# Altium PCB Copy of PCB1.PcbDoc
Units mil, origin at the board's own origin, x right, y up, seen from the top; angles counter-clockwise.
Board outline 1000 x 2250.08 mil, 2 copper layers (Top Layer, Bottom Layer); 42 components, 56 nets, 164 pads, 0 vias.
Unrouted connection lines stored in the file: 74.
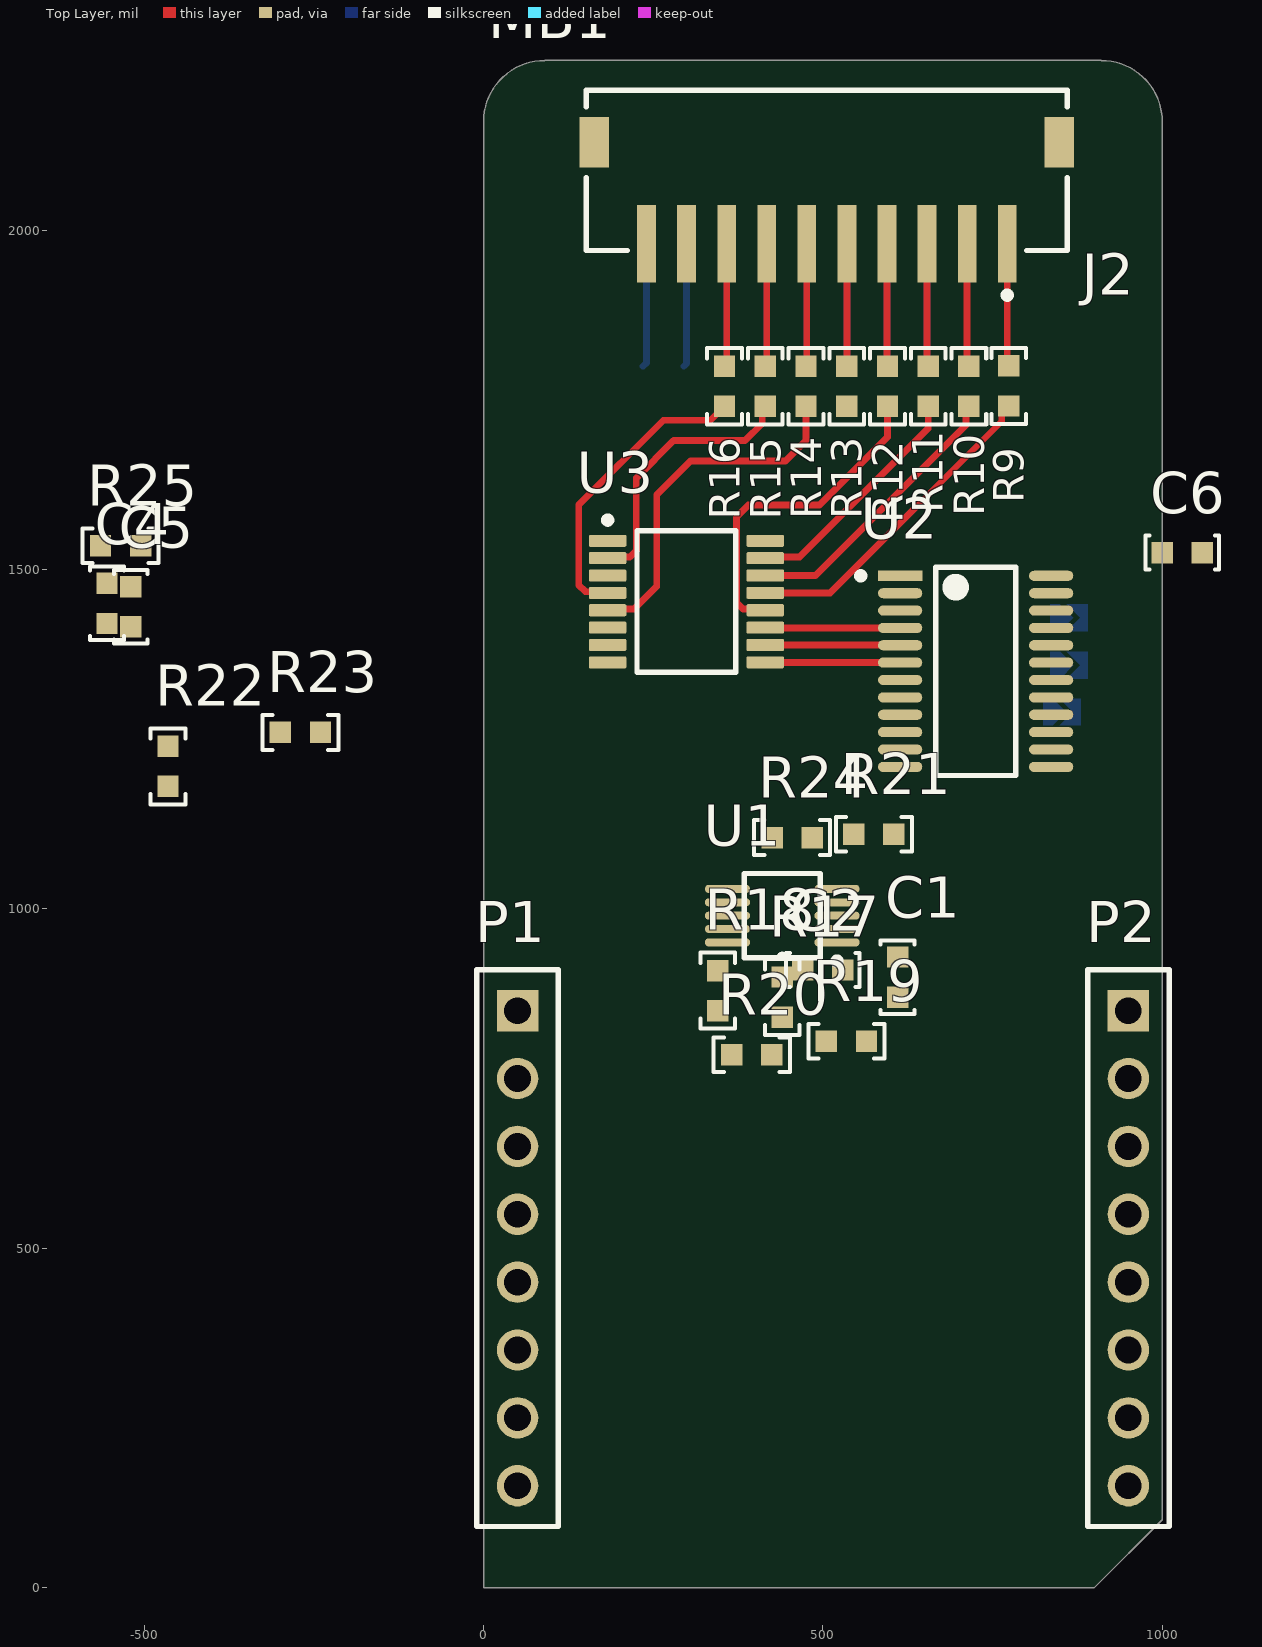
[diagram p0: Top Layer view]
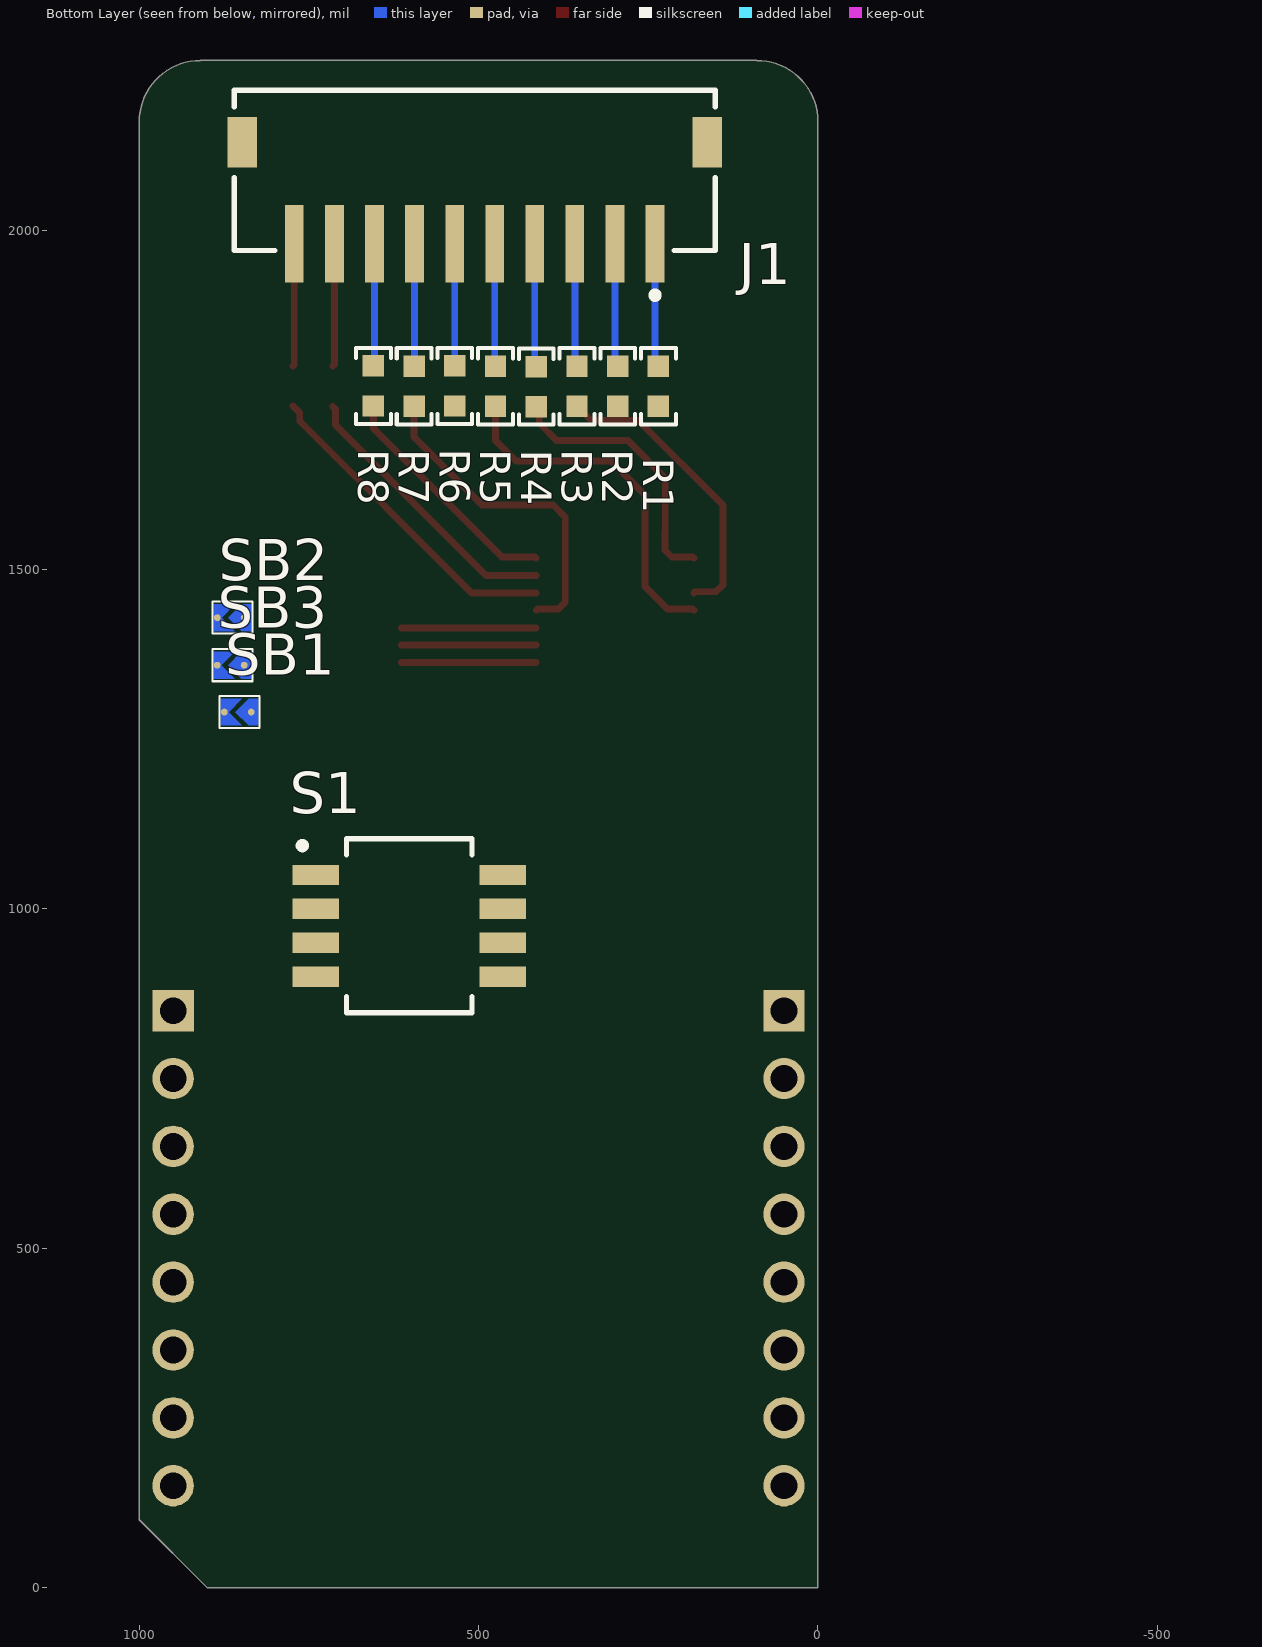
[diagram p1: Bottom Layer view, seen from below]

## Layer stack, top to bottom
Top Solder: solder mask 0.4, Solder Resist, Dk 3.5
Top Layer: signal copper 1.4
Dielectric 1: dielectric 12.6, FR-4, Dk 4.8
Bottom Layer: signal copper 1.4
Bottom Solder: solder mask 0.4, Solder Resist, Dk 3.5

## Board outline
0,0 900,0 1000,100 1000,2160 ccw(c910,2160) 910,2250 909.92,2250.08 90.08,2250.08 90,2250 ccw(c90,2160) 0,2160

## Design rules (kind name [scope] priority, off if disabled: settings)
Clearance [All] p1: gap=10 ignorepadtopadclearanceinfootprint=FALSE
PolygonConnect [All] p1: connectstyle=Relief reliefconductorwidth=10 reliefentries=4 polygonreliefangle="90 Angle" airgapwidth=10
RoutingVias [All] p1: holewidth=28 width=50 viastyle="Through Hole" minholewidth=28 minwidth=50 maxholewidth=28 maxwidth=50
SolderMaskExpansion [All] p1: expansion=0 istentingtop=FALSE
SupplyNets "Schematic Supply Nets_2" [InNet('GND')] p1: voltage=0.000
SupplyNets "Schematic Supply Nets" [InNet('3v3')] p2: voltage=0.000
Width [All] p1: maxlimit=10 minlimit=10 preferedwidth=10
30 further rules are at their usual default settings.

## Classes and differential pairs
net class S[0..7]: S0 S1 S2 S3 S4 S5 S6 S7
net class "P1 [0..7]": "P1 0" "P1 1" "P1 2" "P1 3" "P1 4" "P1 5" "P1 6" "P1 7"
net class "P0 [0..2]": "P0 0" "P0 1" "P0 2"
component class U_TMUX130: C6 U3
component class U_PCAL64: C4 C5 R21 R22 R23 R24 R25 U2
component class U_MKicroBUS: MB1 P1 P2
component class U_MCP3423: C1 C2 R17 R18 R19 R20 U1
component class U_CONN: J1 J2 R1 R2 R3 R4 R5 R6 R7 R8 R9 R10 R11 R12 R13 R15 R16
component class BUS: S1 SB1 SB2 SB3

## Components (designator, comment, footprint, x,y, rotation, side; value= is the part's Value field where it differs from the comment)
C1 "CAP CER 100nF 50V 0603" C_1608[0603] 610,899.53 r270 top value=100nF
C2 "CAP CER 100nF 50V 0603" C_1608[0603] 499.53,910 r0 top value=100nF
C4 "CAP CER 100nF 50V 0603" C_1608[0603] -555,1450 r90 top value=100nF
C5 "CAP CER 100nF 50V 0603" C_1608[0603] -520,1445 r270 top value=100nF
C6 "CAP CER 100nF 50V 0603" C_1608[0603] 1029.53,1525 r0 top value=100nF
J1 "HC-ZH-10PWT" J_S10B-ZR-SM4 505.75,2088.27 r0 bottom locked
J2 "HC-ZH-10PWT" J_S10B-ZR-SM4 505.75,2088.27 r180 top
MB1 "mikroBUS" mikroBUS-Large-No-Connector 0,0 r0 top locked
P1 "ESQ-108-14-T-S" CONN_SKT_01X08_100MIL-ELEVATED-LONGPIN 50,500 r270 top locked
P2 "ESQ-108-14-T-S" CONN_SKT_01X08_100MIL-ELEVATED-LONGPIN 950,500 r270 top locked
R1 "Res 100R 1% 0603" R_1608[0603] 235,1770 r270 bottom value=100R
R2 "Res 100R 1% 0603" R_1608[0603] 295,1770 r270 bottom value=100R
R3 "Res 100R 1% 0603" R_1608[0603] 355,1770 r270 bottom value=100R
R4 "Res 100R 1% 0603" R_1608[0603] 415,1769.53 r270 bottom value=100R
R5 "Res 100R 1% 0603" R_1608[0603] 475,1770 r270 bottom value=100R
R6 "Res 100R 1% 0603" R_1608[0603] 535,1770.47 r270 bottom value=100R
R7 "Res 100R 1% 0603" R_1608[0603] 595,1770 r270 bottom value=100R
R8 "Res 100R 1% 0603" R_1608[0603] 655,1770.47 r270 bottom value=100R
R9 "Res 100R 1% 0603" R_1608[0603] 773.67,1770.47 r270 top value=100R
R10 "Res 100R 1% 0603" R_1608[0603] 715,1770 r270 top value=100R
R11 "Res 100R 1% 0603" R_1608[0603] 655,1770 r270 top value=100R
R12 "Res 100R 1% 0603" R_1608[0603] 595,1770 r270 top value=100R
R13 "Res 100R 1% 0603" R_1608[0603] 535,1770 r270 top value=100R
R14 "Res 100R 1% 0603" R_1608[0603] 475,1770 r270 top value=100R
R15 "Res 100R 1% 0603" R_1608[0603] 415,1770 r270 top value=100R
R16 "Res 100R 1% 0603" R_1608[0603] 355,1770 r270 top value=100R
R17 "Res 1k 1% 0603" R_1608[0603] 440,870 r270 top value=1k
R18 "Res 1k 1% 0603" R_1608[0603] 345,879.53 r270 top value=1k
R19 "Res 10k 1% 0603" R_1608[0603] 534.53,805 r0 top value=10k
R20 "Res 10k 1% 0603" R_1608[0603] 395,785 r0 top value=10k
R21 "Res 10k 1% 0603" R_1608[0603] 575,1110 r180 top value=10k
R22 "Res 10k 1% 0603" R_1608[0603] -465,1210 r270 top value=10k
R23 "Res 10k 1% 0603" R_1608[0603] -270,1260 r0 top value=10k
R24 "Res 10k 1% 0603" R_1608[0603] 454.53,1105 r0 top value=10k
R25 "Res 10k 1% 0603" R_1608[0603] -535,1535 r0 top value=10k
S1 "DSHP04TSGER" S_DIP_SWITCH_50MIL_4POS 602.2,975.08 r270 bottom value="DIP Switch 4pos"
SB1 "Open" SB-TINY-OPEN 854.84,1290 r0 bottom
SB2 "Open" SB-TINY-OPEN 865.16,1429.06 r0 bottom
SB3 "Open" SB-TINY-OPEN 865.31,1359.06 r0 bottom
U1 "MCP3423-E/UN" U_MSOP50P300X500-10(RM-10)_WO-TP 440,990 r90 top
U2 "PCAL6416APW,118" U_TSSOP24_SOT355-1-IPC_B 725,1350 r270 top
U3 "TMUX1308PWR" U_TSSOP65P500X450-16 298.86,1452.8 r270 top

## Footprints (in the part's own frame and the unit in brackets; to place one, negate y for a bottom-side part, rotate by r counter-clockwise, add the part's x,y. Pads: shape width x height; smd on the part's side, far side on the other; paste and mask are expansions set on the pad)
C_1608[0603] [mm] "Capacitor MLCC; Body 1.6 x 0.8 mm (LxW typ)"
  rect 0.8x0.8 smd: 1(-0.75,0) 2(0.75,0)
  silkscreen extent -1.38,-0.64 1.38,0.64, body extent -0.8,-0.4 0.8,0.4, height 0.8
CONN_SKT_01X08_100MIL-ELEVATED-LONGPIN [mm] "SQ Post Socket, 1x8 Pins, Vertical, 2.54mm Pitch, Female"
  rect 1.55x1.55 hole 1: 1(-8.89,0)
  round 1.55 hole 1: 2(-6.35,0) 3(-3.81,0) 4(-1.27,0) 5(1.27,0) 6(3.81,0) 7(6.35,0) 8(8.89,0)
  silkscreen extent -10.41,-1.52 10.42,1.52, body extent -10.66,-1.37 10.66,1.37, height 0.25
J_S10B-ZR-SM4 [mm] "CONN HEADER SMD 10POS 1MM5 RA"
  rect 0.7x2.9 smd paste+0 mask+0: 1(-6.75,2.75) 2(-5.25,2.75) 3(-3.75,2.75) 4(-2.25,2.75) 5(-0.75,2.75) 6(0.75,2.75) 7(2.25,2.75) 8(3.75,2.75) 9(5.25,2.75) 10(6.75,2.75)
  rect 1.1x1.9 smd paste+0 mask+0: 11(8.7,-1.05) 12(-8.7,-1.05)
  silkscreen extent -9,-3 9,4.8, body extent -9,-3 9,3.5, height 3.7
mikroBUS-Large-No-Connector [mil]
R_1608[0603] [mm] "Chip Resistor; Body 1.6 x 0.8 mm (LxW typ)"
  rect 0.8x0.8 smd: 1(-0.75,0) 2(0.75,0)
  silkscreen extent -1.43,-0.65 1.43,0.65, body extent -0.77,-0.42 0.78,0.43, height 0.45
S_DIP_SWITCH_50MIL_4POS [mm] "Dip switch 4pos, pitch 1.27mm, height 1.55mm"
  rect 0.76x1.75 smd paste+0 mask+0: 1(-1.903,-3.5) 2(-0.633,-3.5) 3(0.637,-3.5) 4(1.907,-3.5) 5(1.907,3.5) 6(0.637,3.5) 7(-0.633,3.5) 8(-1.903,3.5)
  silkscreen extent -3.25,-4.13 3.26,2.35, body extent -3.15,-3.35 3.16,3.35, height 1.95
SB-TINY-OPEN [mil]
  round 10 smd paste-10 mask+0.04: 1(-19.84,0)
  round 10 smd paste-10.08 mask+0.04: 2(19.84,0)
  Top Layer region: -6.06,19.68 13.62,0 -6.06,-19.68 24.84,-19.68 24.84,19.68
  Top Layer region: -30.16,-19.68 -30.16,19.68 -15.91,19.68 3.78,0 -15.91,-19.68
  silkscreen extent -32,-24 27,24
U_MSOP50P300X500-10(RM-10)_WO-TP [mm] "Shrink Small Outline; 10 Leads; Body Width 3 mm; Pitch 0.5 mm"
  oval 0.3x1.7 smd mask+0.05: 1(-1,-2.05) 2(-0.5,-2.05) 3(0,-2.05) 4(0.5,-2.05) 5(1,-2.05) 6(1,2.05) 7(0.5,2.05) 8(0,2.05) 9(-0.5,2.05) 10(-1,2.05)
  silkscreen extent -1.82,-2.18 1.58,1.43, body extent -1.6,-2.58 1.6,2.57, height 1.09
U_TSSOP24_SOT355-1-IPC_B [mm]
  rect 0.381x1.655 smd paste+0 mask+0: 1(-3.575,-2.825)
  rrect100% 0.381x1.655 smd paste+0 mask+0: 2(-2.925,-2.825) 3(-2.275,-2.825) 4(-1.625,-2.825) 5(-0.975,-2.825) 6(-0.325,-2.825) 7(0.325,-2.825) 8(0.975,-2.825) 9(1.625,-2.825) 10(2.275,-2.825) 11(2.925,-2.825) 12(3.575,-2.825) 13(3.575,2.825) 14(2.925,2.825) 15(2.275,2.825) 16(1.625,2.825) 17(0.975,2.825) 18(0.325,2.825) 19(-0.325,2.825) 20(-0.975,2.825) 21(-1.625,2.825) 22(-2.275,2.825) 23(-2.925,2.825) 24(-3.575,2.825)
  silkscreen extent -3.9,-4.43 3.9,1.5, body extent -4.15,-3.9 4.15,3.9, height 0.25
U_TSSOP65P500X450-16 [mm] "SOP, 16-Leads, Body 5x4.5mm, Pitch 0.65mm, IPC Medium Density"
  rrect22% 0.45x1.4 smd: 1(-2.275,-2.95) 2(-1.625,-2.95) 3(-0.975,-2.95) 4(-0.325,-2.95) 5(0.325,-2.95) 6(0.975,-2.95) 7(1.625,-2.95) 8(2.275,-2.95) 9(2.275,2.95) 10(1.625,2.95) 11(0.975,2.95) 12(0.325,2.95) 13(-0.325,2.95) 14(-0.975,2.95) 15(-1.625,2.95) 16(-2.275,2.95)
  silkscreen extent -3.17,-3.07 2.65,1.85, body extent -3,-4.35 3,4.35, height 0.25

## Part data
C1 C2 C4 C5 C6: library part CAP002, "Capacitor type 1", Dielectric=X7R, Manufacturer 1=Yageo, Manufacturer Part Number 1=CC0603KRX7R9BB104, Rated Voltage=50V, Supplier Part Number 1=C14663, Tolerance=10%, Code CEGEP=COND0143SM, LibRef=CAP002, Mounting Technology=SMT, Supplier 1=LCSC
J1 J2: library part CONN-1MM5-01X10-S10B-H-SMT, "CONN wire to board SMT R/A 10POS 1.5mm", Manufacturer 1=HCTL, Manufacturer 2=JST, Manufacturer Part Number 2=S10B-ZR-SM4A-TF(LF)(SN), Supplier Part Number 1=C2845432, Manufacturer Part Number 1=HC-ZH-10PWT, Mounting Technology=SMT, Supplier 1=LCSC, Supplier 2=LCSC, Supplier 3=Digikey, Supplier Part Number 2=C5149249, Supplier Part Number 3=455-1700-1-ND
MB1: library part "mikroBUS compatible add-on board", "mikroBUS compatible add-on board"
P1 P2: library part CONN-100MIL-SKT-01X08_ELEVATED_LONGPIN, "CONN SOCKET 8pos 100mils Elevated", Manufacturer 1=Samtec, Supplier Part Number 1=SAM9303-ND, Manufacturer Part Number 1=ESQ-108-14-T-S, Mounting Technology=TH, Supplier 1=Digikey
R1 R2 R3 R4 R5 R6 R7 R8 R9 R10 R11 R12 R13 R14 R15 R16: library part RES029, "Resistor type 1", Manufacturer 1=Yageo, Manufacturer Part Number 1=RC0603FR-07100RL, Max Working Voltage=75V, Supplier Part Number 1=C105588, Tolerance=1%, LibRef=RES029, Mounting Technology=SMT, Puissance=1/10W, Supplier 1=LCSC
R17 R18: library part RES015, "Resistor type 1", Manufacturer 1=Yageo, Manufacturer Part Number 1=RC0603FR-071KL, Max Working Voltage=75V, Supplier Part Number 1=C22548, Tolerance=1%, LibRef=RES015, Mounting Technology=SMT, Puissance=1/10W, Supplier 1=LCSC
R19 R20 R21 R22 R23 R24 R25: library part RES001, "Resistor type 1", Manufacturer 1=Yageo, Manufacturer Part Number 1=RC0603FR-0710KL, Max Working Voltage=75V, Supplier Part Number 1=C98220, Tolerance=1%, Code CEGEP=RESI0238-0603, LibRef=RES001, Mounting Technology=SMT, Puissance=1/10W, Supplier 1=LCSC
S1: library part SW_DIP_50MIL_4POS, "SWITCH DIP SLIDE SPST 25MA 24V, pitch 1.27mm, height 1.55mm", Manufacturer 1=kangshen, Manufacturer 2=Omron, Manufacturer Part Number 2=A6H-4102-PM, Supplier Part Number 1=C3293144, Manufacturer Part Number 1=DSHP04TSGER, Mounting Technology=SMT, Supplier 1=LCSC, Supplier 2=LCSC, Supplier 3=Digikey, Supplier Part Number 2=C2733274, Supplier Part Number 3=39-A6H-4102-PMCT-ND
SB1 SB2 SB3: library part Solder-Jumper-Open, "Solder Jumper"
U1: library part U_MCP3423-E/UN, "CAN Controller Stand-Alone With SPI, 18-Pin PDIP", Manufacturer 1=Microchip, Supplier Part Number 1=C220864, Manufacturer Part Number 1=MCP3423-E/UN, Mounting Technology=SMT, Supplier 1=LCSC, Supplier 2=Digikey, Supplier Part Number 2=MCP3423-E/UN-ND
U2: library part U_PCAL6416APW, "IC I/O EXPANDER 16BIT 24TSSOP", Manufacturer 1="Texas Instruments", Manufacturer 2="NXP Semiconductors", Manufacturer Part Number 1=TCA6416APWR, Supplier Part Number 1=C130203, Manufacturer Part Number 2=PCAL6416APW,118, Mounting Technology=SMT, Supplier 1=LCSC, Supplier 2=LCSC, Supplier 3=Digikey, Supplier Part Number 2=C2652299, Supplier Part Number 3=568-9922-1-ND
U3: library part U_TMUX1308PWR, "IC MUX 8:1 195OHM 16TSSOP", Manufacturer 1=TI, Supplier Part Number 1=C970231, Manufacturer Part Number 1=TMUX1308PWR, Mounting Technology=SMT, Supplier 1=LCSC, Supplier 2=Digikey, Supplier Part Number 2=296-TMUX1308PWRCT-ND

## Nets (pads, with @x,y where several pads share a name; then routed paths per layer and width w, separated by ;. In a path a pad name is that pad's centre, name@x,y a point inside that pad or via, vN(x,y) a via of type N, cw(c..) or ccw(c..) an arc to the next point about the centre after c; other vN are vias at no path point)
3v3: C2.2 C4.2 C5.2 C6.2 J1.9 J2.9 P1.7 R21.1 R22.1 R23.1 R24.1 S1.2 S1.3 S1.4 U1.6 U2.2 U2.24 U3.16
AN: P1.1 SB2.1
GND: C1.2 C2.1 C4.1 C5.1 C6.1 J1.10 J1.11 J1.12 J2.10 J2.11 J2.12 P1.8 P2.8 R18.2 R19.2 R20.2 R25.2 U1.2 U1.3 U1.4 U1.5 U2.12 U3.8
NetC1_1: C1.1 R17.2 R18.1 U1.1
NetJ1_1: J1.1 R1.1 | length 182.5
  Bottom Layer w10: R1.1 240,1804.53 J1.1
NetJ1_2: J1.2 R2.1 | length 182.2
  Bottom Layer w10: R2.1 299.06,1803.58 J1.2
NetJ1_3: J1.3 R3.1 | length 181.8
  Bottom Layer w10: R3.1 358.11,1802.64 J1.3
NetJ1_4: J1.4 R4.1 | length 181.8
  Bottom Layer w10: R4.1 417.17,1801.22 J1.4
NetJ1_5: J1.5 R5.1 | length 181
  Bottom Layer w10: R5.1 476.22,1800.75 J1.5
NetJ1_6: J1.6 R6.1 | length 180.1
  Bottom Layer w10: R6.1 535.28,1800.28 J1.6
NetJ1_7: J1.7 R7.1 | length 180.7
  Bottom Layer w10: J1.7 594.33,1800.2 R7.1
NetJ1_8: J1.8 R8.1 | length 180.7
  Bottom Layer w10: J1.8 653.39,1801.61 R8.1
NetJ2_1: J2.1 R9.1 | length 180.9
  Top Layer w10: J2.1 771.5,1802.17 R9.1
NetJ2_2: J2.2 R10.1 | length 181.5
  Top Layer w10: J2.2 712.44,1802.09 R10.1
NetJ2_3: J2.3 R11.1 | length 181.1
  Top Layer w10: J2.3 653.39,1801.14 R11.1
NetJ2_4: J2.4 R12.1 | length 180.7
  Top Layer w10: J2.4 594.33,1800.2 R12.1
NetJ2_5: J2.5 R13.1 | length 180.6
  Top Layer w10: R13.1 535.28,1799.8 J2.5
NetJ2_6: J2.6 R14.1 | length 181
  Top Layer w10: R14.1 476.22,1800.75 J2.6
NetJ2_7: J2.7 R15.1 | length 181.4
  Top Layer w10: R15.1 417.17,1801.69 J2.7
NetJ2_8: J2.8 R16.1 | length 181.8
  Top Layer w10: R16.1 358.11,1802.64 J2.8
NetP1_2: P1.2 R21.2 U2.3
NetP1_3: P1.3
NetP1_4: P1.4
NetP1_5: P1.5
NetP1_6: P1.6
NetP2_2: P2.2 R24.2 U2.1
NetP2_3: P2.3
NetP2_4: P2.4
NetP2_5: P2.5 R22.2 U1.8 U2.22
NetP2_6: P2.6 R23.2 U1.7 U2.23
NetR17_1: R17.1 SB3.1
NetSB1_2: SB1.2 SB2.2 SB3.2 U3.3
NetU2_7: U2.7 U3.6
"P0 0": U2.4 U3.11 | length 198.3
  Top Layer w10: U3.11@415.43,1413.98 U2.4
"P0 1": U2.5 U3.10 | length 198.9
  Top Layer w10: U3.10 415.22,1388.6 613.55,1388.6 U2.5
"P0 2": U2.6 U3.9 | length 198.9
  Top Layer w10: U3.9 415.22,1363.01 613.55,1363.01 U2.6
"P1 0": R1.2 U2.13
"P1 1": R2.2 U2.14
"P1 2": R3.2 U2.15
"P1 3": R4.2 U2.16
"P1 4": R5.2 U2.17
"P1 5": R6.2 U2.18
"P1 6": R7.2 U2.19
"P1 7": R8.2 U2.20
PWM: P2.1 SB1.1
S0: R9.2 U3.13 | length 479.9
  Top Layer w10: U3.13 510.59,1465.59 763.45,1718.45 763.45,1730.73 R9.2
S1: R10.2 U3.14 | length 417
  Top Layer w10: U3.14 489.18,1491.18 710.86,1712.86 710.86,1736.33 R10.2
S2: R11.2 U3.15 | length 351.8
  Top Layer w10: U3.15 416.73,1518.5 465.65,1518.5 655,1707.86 R11.2
S3: R12.2 U3.12 | length 489.9
  Top Layer w10: U3.12 413.27,1441.73 382.37,1441.73 372.44,1451.66 372.44,1577.44 390,1595 495,1595 595,1695 R12.2
S4: R13.2 U3.1
S5: R14.2 U3.5 | length 525.4
  Top Layer w10: U3.5 184.45,1441.73 221.73,1441.73 255,1475 255,1610 305,1660 445,1660 475,1690 R14.2
S6: R15.2 U3.2 | length 399.8
  Top Layer w10: U3.2 184.45,1518.5 215.35,1518.5 225.28,1528.43 225.28,1556.29 225,1556.57 225,1635 280,1690 385,1690 410.58,1715.58 410.58,1736.05 R15.2
S7: R16.2 U3.4 | length 440.5
  Top Layer w10: U3.4 180.98,1467.32 150.09,1467.32 140,1477.41 140,1595 265,1720 334.53,1720 R16.2
SW1: R25.1 S1.7 U2.21
SW2: R20.1 S1.6 U1.9
SW3: R19.1 S1.5 U1.10
pads on no net: P2.7 S1.1 S1.8 U2.8 U2.9 U2.10 U2.11 U3.7

## Silkscreen, mask and mechanical layers (free items; w line width, h text height)
Mechanical 1:
  lines w10: 90,2250 ccw(c90,2160) 0,2160 0,0 900,0 1000,100 1000,2160 ccw(c910,2160) 910,2250 ; 90.08,2250.08 909.92,2250.08

## Text inside footprints (layer, text, board x,y; h text height)
MB1: Top Assembly "CS" at 109.72,603 h47.24; Top Assembly "AN" at 109.72,803 h47.24; Top Assembly "SDI" at 109.72,304.22 h47.24; Top Assembly "3V3" at 109.72,205.21 h47.24; Top Assembly "RST" at 109.72,703 h47.24; Top Assembly "SCK" at 109.72,500 h47.24; Top Assembly "SDO" at 109.72,403.75 h47.24; Top Assembly "GND" at 109.72,104.45 h47.24; Top Assembly "PWM" at 671.49,802.54 h47.24; Top Assembly "GND" at 687.13,100.89 h47.24; Top Assembly "SDA" at 696.47,303.88 h47.24; Top Assembly "SCL" at 709.6,405 h47.24; Top Assembly "INT" at 742.44,701.21 h47.24; Top Assembly "RX" at 759.83,503.39 h47.24; Top Assembly "TX" at 764.83,603.39 h47.24; Top Assembly "5V" at 766.38,203.39 h47.24